# Altium PCB opto.PcbDoc (part 1 of 2)
Units mm, origin at the board's own origin, x right, y up, seen from the top; angles counter-clockwise.
Board outline 200 x 100 mm, 4 copper layers (Top Layer, Internal Plane 1, Internal Plane 2, Bottom Layer); 191 components, 0 nets, 885 pads, 39 vias.
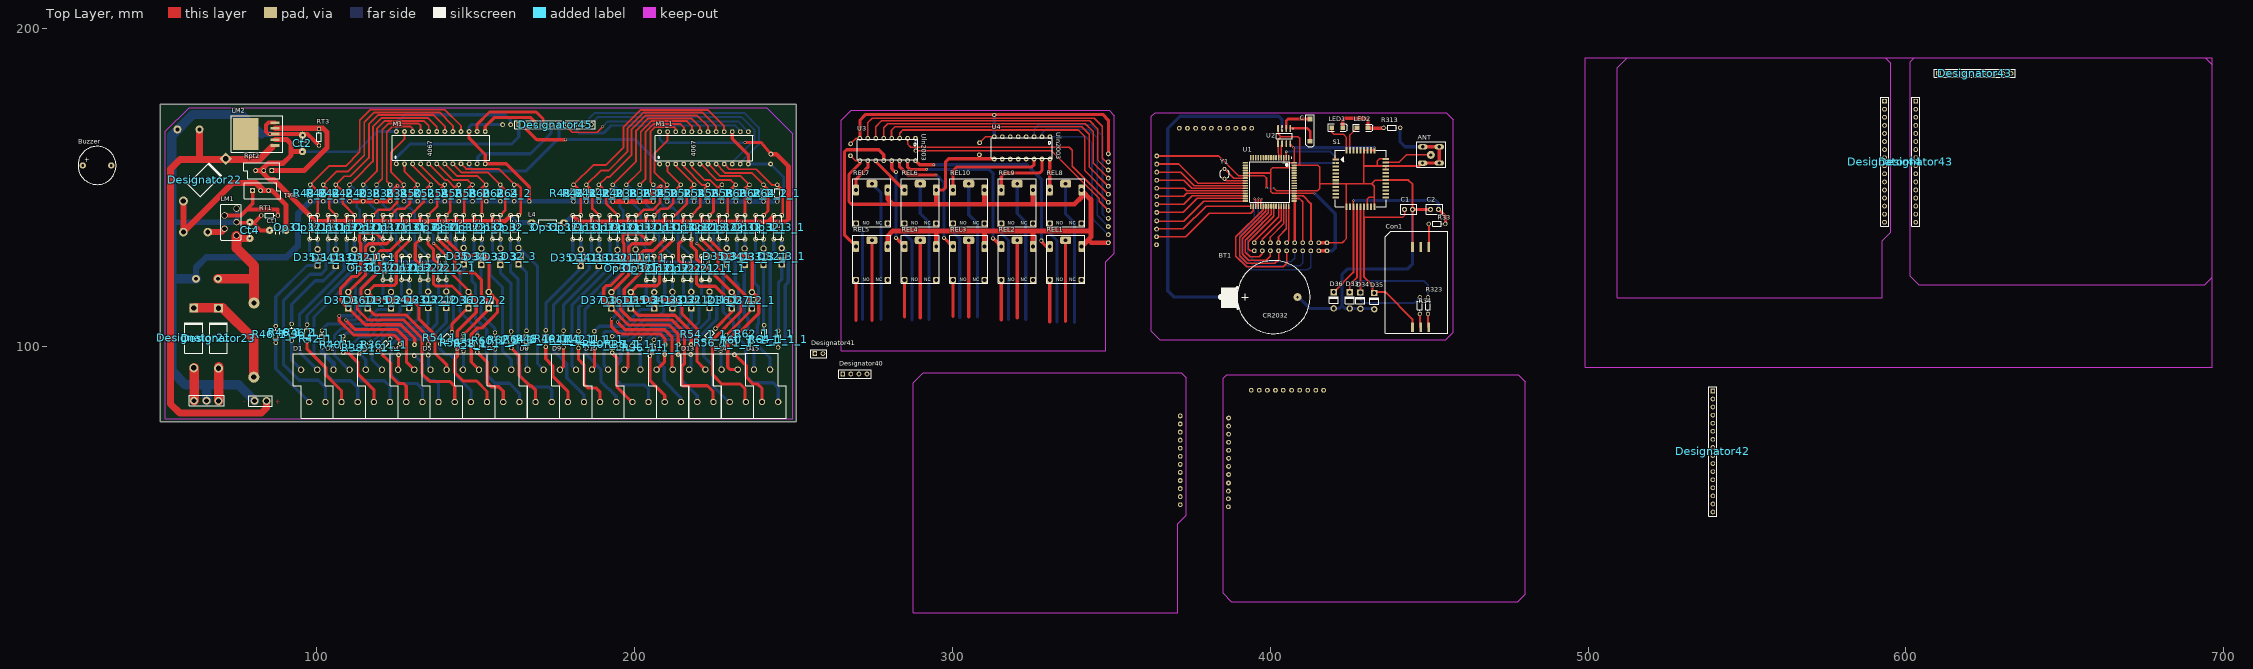
[diagram p0: Top Layer view]
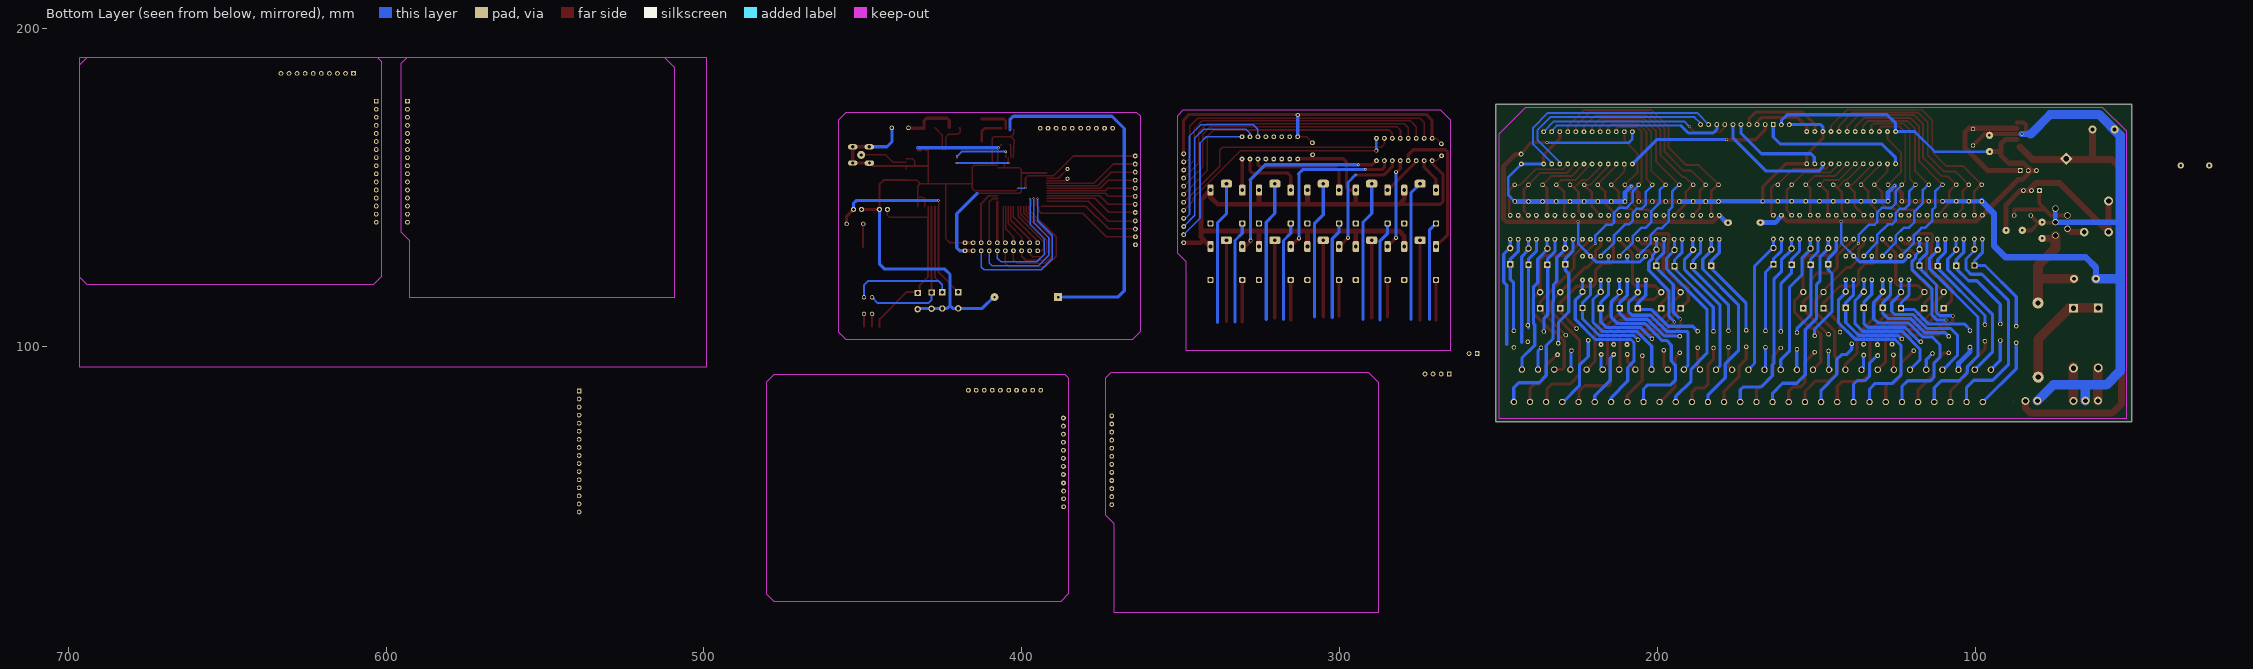
[diagram p1: Bottom Layer view, seen from below]
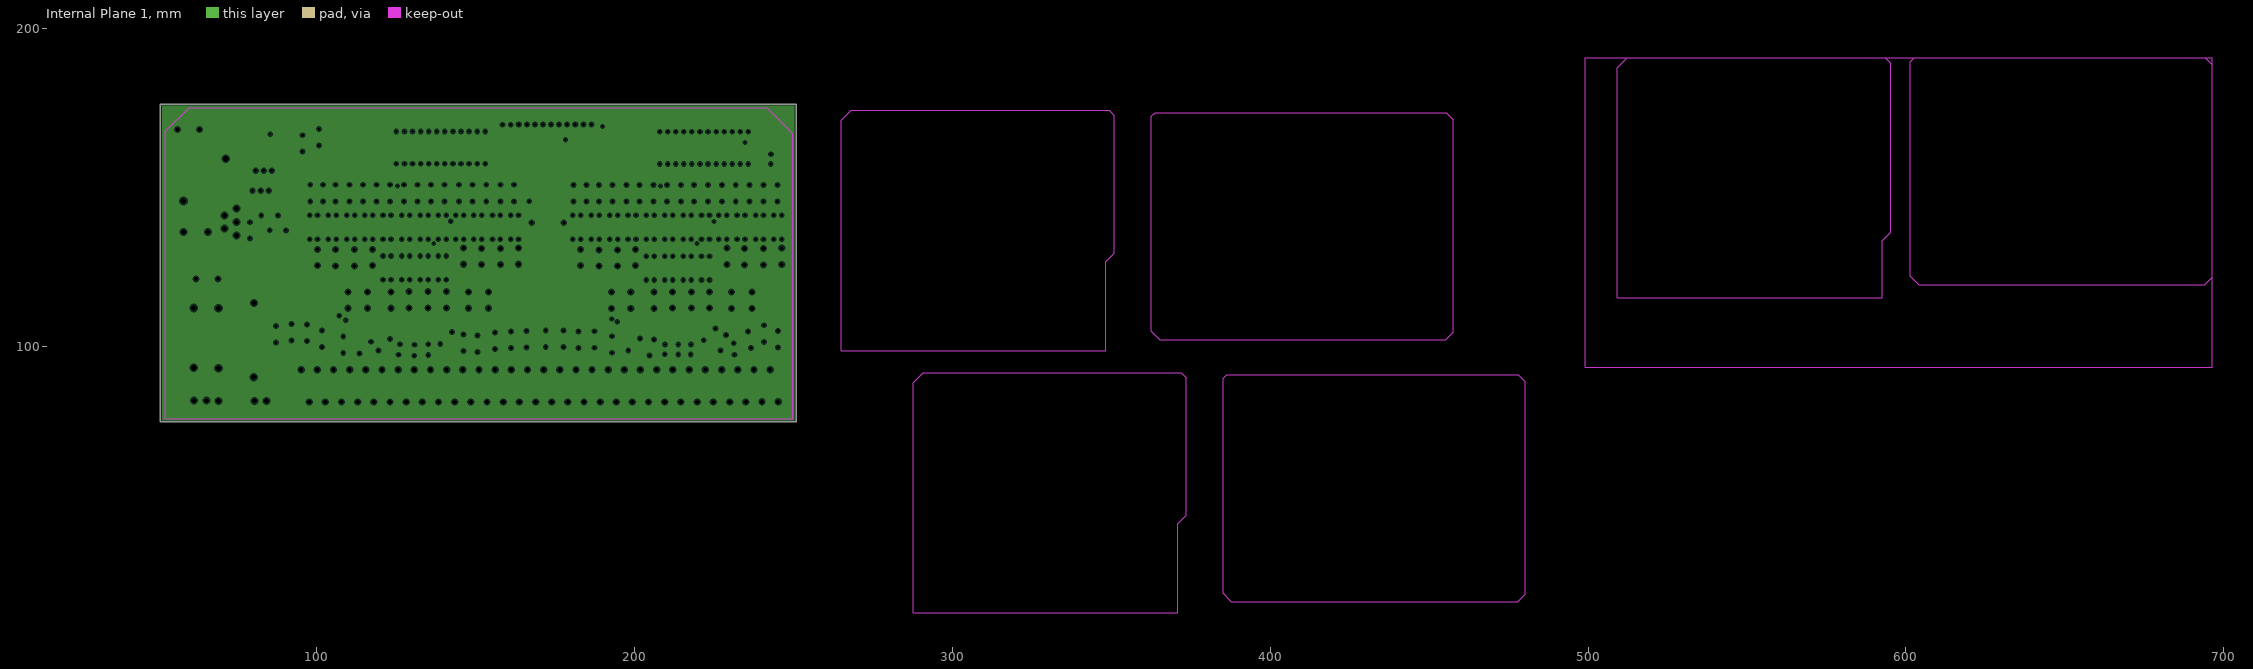
[diagram p2: Internal Plane 1, clearances drawn from the general rule]
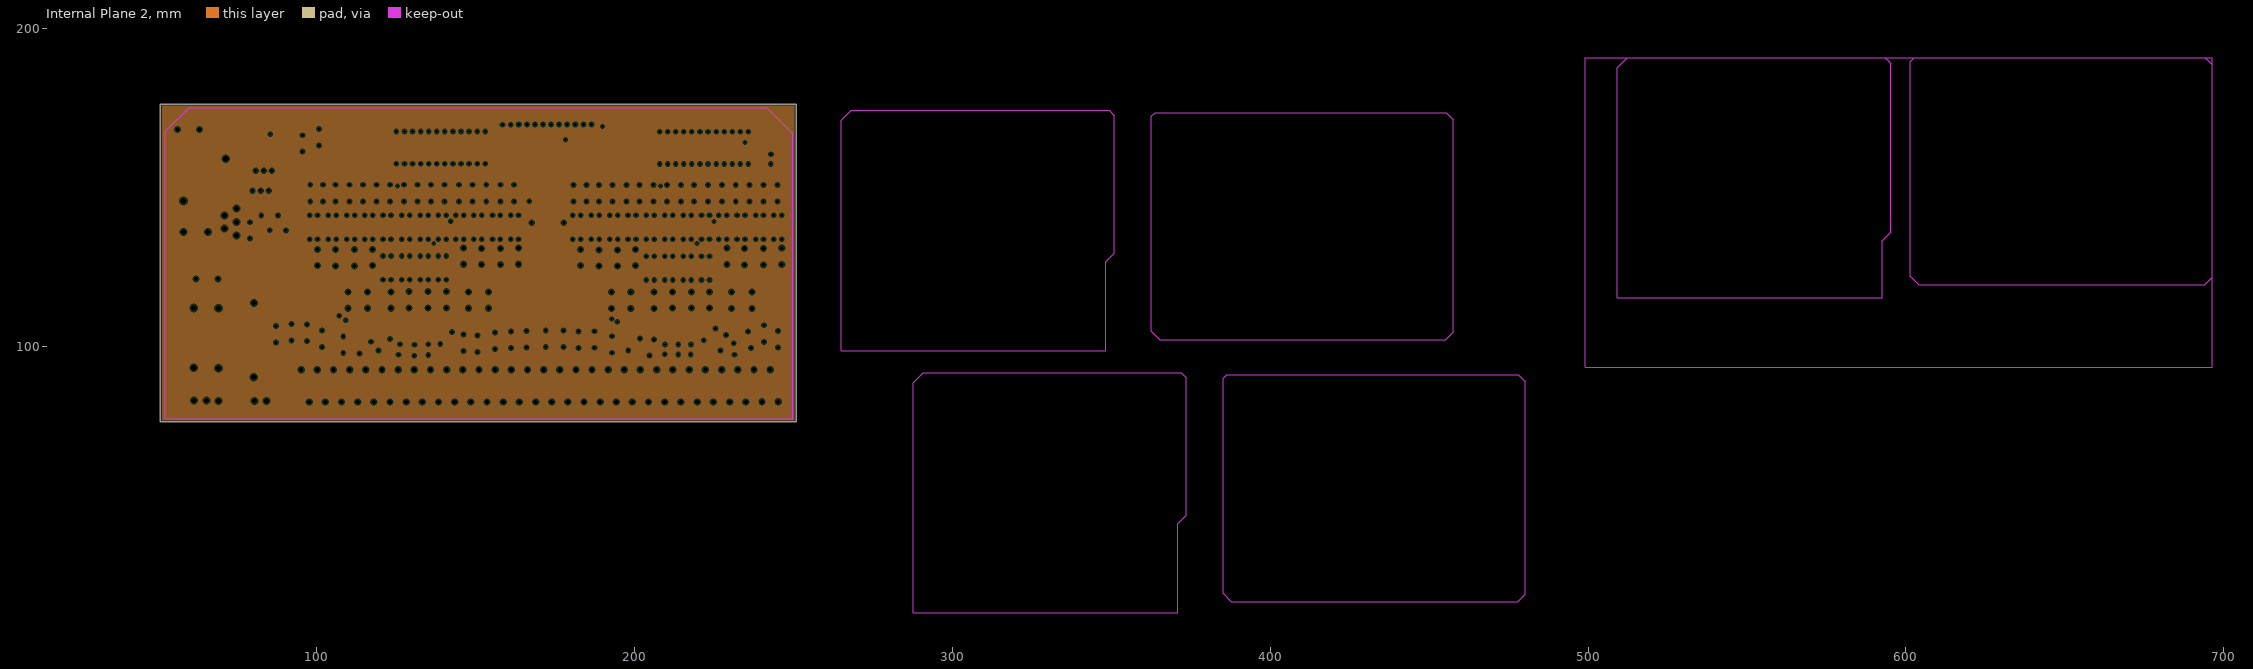
[diagram p3: Internal Plane 2, clearances drawn from the general rule]

## Layer stack, top to bottom
Top Solder: solder mask 0.0102, Solder Resist, Dk 3.5
Top Layer: signal copper 0.0356
Dielectric1: dielectric 0.32, FR-4, Dk 4.8
Internal Plane 1: plane copper 0.0356
Dielectric2: dielectric 0.32, FR-4, Dk 4.8
Internal Plane 2: plane copper 0.0356
Dielectric3: dielectric 0.32, FR-4, Dk 4.8
Bottom Layer: signal copper 0.0356
Bottom Solder: solder mask 0.0102, Solder Resist, Dk 3.5

## Board outline
50.8,76.2 250.8,76.2 250.8,176.2 50.8,176.2

## Design rules (kind name [scope] priority, off if disabled: settings)
Clearance [All] p1: gap=0.2 ignorepadtopadclearanceinfootprint=FALSE except(0: Arc-Hole Track-Hole SMDPad-Hole THPad-Hole Via-Hole Fill-Hole Poly-Hole Region-Hole Text-Hole)
PlaneClearance [All] p1: clearance=0.508
PlaneConnect [All] p1: planeconnectstyle=Relief reliefexpansion=0.508 reliefentries=4 reliefconductorwidth=0.254 reliefairgap=0.254
PolygonConnect [All] p1: connectstyle=Relief reliefconductorwidth=0.254 reliefentries=4 polygonreliefangle="90 Angle" airgapwidth=0.254
RoutingVias [All] p1: holewidth=0.6 width=1 viastyle="Through Hole" minholewidth=0.711 minwidth=1.27 maxholewidth=0.711 maxwidth=1.27
SolderMaskExpansion [All] p1: expansion=0.102
Width [All] p1: maxlimit=0.2 minlimit=0.2 preferedwidth=0.2
28 further rules are at their usual default settings.

## Components (designator, comment, footprint, x,y, rotation, side; value= is the part's Value field where it differs from the comment)
ANT "Antenna" ANT-R-RF 455.199,172.536 r180 top
BT1 "Battery" CR2032 399.544,115.487 r0 top
Buzzer "Buzzer" BUZZER 30.861,156.896 r0 top
C "Crystal" Crystal 412.494,171.512 r270 top
C1 "Cap" CAPR2.54-5.1x3.2 443.515,143.072 r0 top
C2 "Cap" CAPR2.54-5.1x3.2 451.643,143.072 r0 top
Con1 "SIM Socket" "sim card holder" 437.419,134.944 r90 top
Ct1 "22pF" RAD_ADA 90.269,136.449 r180 top
Ct2 "22pF" RAD_ADA 95.476,161.265 r90 top
Ct4 "22pF" RAD_ADA 78.94,133.935 r90 top (schematic designator Ct2)
D1 "Comment" "Conector 4 Pin" 95.061,92.616 r0 top
D2 "Comment" "Conector 4 Pin" 105.236,92.616 r0 top
D3 "Comment" "Conector 4 Pin" 115.411,92.616 r0 top
D4 "Comment" "Conector 4 Pin" 125.586,92.616 r0 top
D5 "Comment" "Conector 4 Pin" 135.761,92.616 r0 top
D6 "Comment" "Conector 4 Pin" 145.936,92.616 r0 top
D7 "Comment" "Conector 4 Pin" 156.111,92.616 r0 top
D8 "Comment" "Conector 4 Pin" 166.286,92.616 r0 top
D9 "Comment" "Conector 4 Pin" 176.461,92.616 r0 top
D10 "Comment" "Conector 4 Pin" 186.586,92.641 r0 top
D11 "Comment" "Conector 4 Pin" 196.736,92.641 r0 top
D12 "Comment" "Conector 4 Pin" 206.911,92.641 r0 top
D13 "Comment" "Conector 4 Pin" 217.161,92.641 r0 top
D14 "Comment" "Conector 4 Pin" 227.361,92.641 r0 top
D15 "Comment" "Conector 4 Pin" 237.538,92.66 r0 top
D32_1_1 "Diode 1N4007 vertical" "D 50mm" 117.497,125.276 r270 top (schematic designator D32)
D32_1_1_1 "Diode 1N4007 vertical" "D 50mm" 200.301,125.225 r270 top (schematic designator D32)
D32_2_1 "Diode 1N4007 vertical" "D 50mm" 140.738,111.964 r270 top (schematic designator D32)
D32_2_1_1 "Diode 1N4007 vertical" "D 50mm" 223.542,111.913 r270 top (schematic designator D32)
D32_3 "Diode 1N4007 vertical" "D 50mm" 163.471,125.68 r270 top (schematic designator D32)
D32_3_1 "Diode 1N4007 vertical" "D 50mm" 246.275,125.629 r270 top (schematic designator D32)
D33 "Diode 1N4007 vertical" "D 50mm" 424.994,117.112 r90 top
D33_1_1 "Diode 1N4007 vertical" "D 50mm" 111.782,125.149 r270 top (schematic designator D32)
D33_1_1_1 "Diode 1N4007 vertical" "D 50mm" 194.586,125.098 r270 top (schematic designator D32)
D33_2_1 "Diode 1N4007 vertical" "D 50mm" 135.023,111.941 r270 top (schematic designator D32)
D33_2_1_1 "Diode 1N4007 vertical" "D 50mm" 217.827,111.89 r270 top (schematic designator D32)
D33_3 "Diode 1N4007 vertical" "D 50mm" 157.756,125.553 r270 top (schematic designator D32)
D33_3_1 "Diode 1N4007 vertical" "D 50mm" 240.56,125.502 r270 top (schematic designator D32)
D34 "Diode 1N4007 vertical" "D 50mm" 428.339,117.037 r90 top
D34_1_1 "Diode 1N4007 vertical" "D 50mm" 105.94,125.172 r270 top (schematic designator D32)
D34_1_1_1 "Diode 1N4007 vertical" "D 50mm" 188.744,125.121 r270 top (schematic designator D32)
D34_2_1 "Diode 1N4007 vertical" "D 50mm" 129.054,111.941 r270 top (schematic designator D32)
D34_2_1_1 "Diode 1N4007 vertical" "D 50mm" 211.858,111.89 r270 top (schematic designator D32)
D34_3 "Diode 1N4007 vertical" "D 50mm" 151.787,125.553 r270 top (schematic designator D32)
D34_3_1 "Diode 1N4007 vertical" "D 50mm" 234.591,125.502 r270 top (schematic designator D32)
D35 "Diode 1N4007 vertical" "D 50mm" 432.719,116.887 r90 top
D35_1_1 "Diode 1N4007 vertical" "D 50mm" 100.225,125.276 r270 top (schematic designator D32)
D35_1_1_1 "Diode 1N4007 vertical" "D 50mm" 183.029,125.225 r270 top (schematic designator D32)
D35_2_1 "Diode 1N4007 vertical" "D 50mm" 123.339,111.837 r270 top (schematic designator D32)
D35_2_1_1 "Diode 1N4007 vertical" "D 50mm" 206.143,111.786 r270 top (schematic designator D32)
D35_3 "Diode 1N4007 vertical" "D 50mm" 146.199,125.68 r270 top (schematic designator D32)
D35_3_1 "Diode 1N4007 vertical" "D 50mm" 229.003,125.629 r270 top (schematic designator D32)
D36 "Diode 1N4007 vertical" "D 50mm" 419.944,117.162 r90 top
D36_1_1 "Diode 1N4007 vertical" "D 50mm" 115.973,111.837 r270 top (schematic designator D32)
D36_1_1_1 "Diode 1N4007 vertical" "D 50mm" 198.777,111.786 r270 top (schematic designator D32)
D36_2 "Diode 1N4007 vertical" "D 50mm" 147.723,111.837 r270 top (schematic designator D32)
D36_2_1 "Diode 1N4007 vertical" "D 50mm" 230.527,111.786 r270 top (schematic designator D32)
D37_1_1 "Diode 1N4007 vertical" "D 50mm" 109.877,111.837 r270 top (schematic designator D32)
D37_1_1_1 "Diode 1N4007 vertical" "D 50mm" 192.681,111.786 r270 top (schematic designator D32)
D37_2 "Diode 1N4007 vertical" "D 50mm" 154.073,111.837 r270 top (schematic designator D32)
D37_2_1 "Diode 1N4007 vertical" "D 50mm" 236.877,111.786 r270 top (schematic designator D32)
Designator21 "Comment" DO-201AD 61.261,102.616 r90 top
Designator22 "Comment" DO-201AD 64.691,152.375 r45 top
Designator23 "Comment" DO-201AD 69.061,102.541 r90 top
Designator40 "Comment" HDR1X4 265.481,91.288 r0 top
Designator41 "Comment" HDR1X2 256.692,97.688 r0 top
Designator42 "Comment" HDR1X16 539.242,85.954 r270 top
Designator43 "Comment" HDR1X16 603.08,177.123 r270 top
Designator43 "Comment" HDR1X10 610.205,185.868 r0 top
Designator44 "Comment" HDR1X16 593.259,177.123 r270 top
Designator45 "Comment" HDR1X10 163.529,169.742 r0 top
L4 "Ferrite-bead" Ferrite-bead 177.736,138.891 r0 top (schematic designator L2)
LED1 "Red" "LED SMD 1206" 421.069,168.787 r0 top
LED2 "Red" "LED SMD 1206" 429.019,168.737 r0 top
LM1 "LM2596T" LM2596T 74.749,143.333 r270 top
LM2 "LM2596T" "LM2596T SMD" 86.84,163.17 r90 top
M1 "Multiplexer_4067" Multiplexer_4067 125.041,157.404 r90 top (schematic designator M2)
M1_1 "Multiplexer_4067" Multiplexer_4067 207.845,157.354 r90 top (schematic designator M2)
Op31_1_1_1_1 "NEC_Opto" NEC_Optocupler 100.225,128.728 r90 top (schematic designator Op31)
Op31_1_1_1_1_1 "NEC_Opto" NEC_Optocupler 183.029,128.677 r90 top (schematic designator Op31)
Op31_1_1_2_1 "NEC_Opto" NEC_Optocupler 123.339,115.901 r90 top (schematic designator Op31)
Op31_1_1_2_1_1 "NEC_Opto" NEC_Optocupler 206.143,115.85 r90 top (schematic designator Op31)
Op31_1_1_3 "NEC_Opto" NEC_Optocupler 123.339,128.728 r90 top (schematic designator Op31)
Op31_1_1_3_1 "NEC_Opto" NEC_Optocupler 206.143,128.677 r90 top (schematic designator Op31)
Op31_1_2 "NEC_Opto" NEC_Optocupler 146.199,128.728 r90 top (schematic designator Op31)
Op31_1_2_1 "NEC_Opto" NEC_Optocupler 229.003,128.677 r90 top (schematic designator Op31)
Op31_2_1_1 "NEC_Opto" NEC_Optocupler 111.909,128.728 r90 top (schematic designator Op31)
Op31_2_1_1_1 "NEC_Opto" NEC_Optocupler 194.713,128.677 r90 top (schematic designator Op31)
Op31_2_2_1 "NEC_Opto" NEC_Optocupler 135.023,115.901 r90 top (schematic designator Op31)
Op31_2_2_1_1 "NEC_Opto" NEC_Optocupler 217.827,115.85 r90 top (schematic designator Op31)
Op31_2_3 "NEC_Opto" NEC_Optocupler 135.023,128.728 r90 top (schematic designator Op31)
Op31_2_3_1 "NEC_Opto" NEC_Optocupler 217.827,128.677 r90 top (schematic designator Op31)
Op31_3 "NEC_Opto" NEC_Optocupler 157.756,128.728 r90 top (schematic designator Op31)
Op31_3_1 "NEC_Opto" NEC_Optocupler 240.56,128.677 r90 top (schematic designator Op31)
Op32_1_1_1_1 "NEC_Opto" NEC_Optocupler 106.067,128.728 r90 top (schematic designator Op31)
Op32_1_1_1_1_1 "NEC_Opto" NEC_Optocupler 188.871,128.677 r90 top (schematic designator Op31)
Op32_1_1_2_1 "NEC_Opto" NEC_Optocupler 129.181,115.901 r90 top (schematic designator Op31)
Op32_1_1_2_1_1 "NEC_Opto" NEC_Optocupler 211.985,115.85 r90 top (schematic designator Op31)
Op32_1_1_3 "NEC_Opto" NEC_Optocupler 129.181,128.728 r90 top (schematic designator Op31)
Op32_1_1_3_1 "NEC_Opto" NEC_Optocupler 211.985,128.677 r90 top (schematic designator Op31)
Op32_1_2 "NEC_Opto" NEC_Optocupler 151.914,128.728 r90 top (schematic designator Op31)
Op32_1_2_1 "NEC_Opto" NEC_Optocupler 234.718,128.677 r90 top (schematic designator Op31)
Op32_2_1_1 "NEC_Opto" NEC_Optocupler 117.624,128.728 r90 top (schematic designator Op31)
Op32_2_1_1_1 "NEC_Opto" NEC_Optocupler 200.428,128.677 r90 top (schematic designator Op31)
Op32_2_2_1 "NEC_Opto" NEC_Optocupler 140.738,115.901 r90 top (schematic designator Op31)
Op32_2_2_1_1 "NEC_Opto" NEC_Optocupler 223.542,115.85 r90 top (schematic designator Op31)
Op32_2_3 "NEC_Opto" NEC_Optocupler 140.738,128.728 r90 top (schematic designator Op31)
Op32_2_3_1 "NEC_Opto" NEC_Optocupler 223.542,128.677 r90 top (schematic designator Op31)
Op32_3 "NEC_Opto" NEC_Optocupler 163.471,128.728 r90 top (schematic designator Op31)
Op32_3_1 "NEC_Opto" NEC_Optocupler 246.275,128.677 r90 top (schematic designator Op31)
R33 "Res3" Res50 453.675,138.5 r0 top
R34 "Res3" Res50 447.071,111.576 r270 top
R34_2 "Resistor vertical" Res50 127.403,149.429 r90 top (schematic designator R34)
R34_2_1 "Resistor vertical" Res50 210.207,149.378 r90 top (schematic designator R34)
R36_1_1 "Resistor vertical" Res50 122.061,101.316 r45 top (schematic designator R36)
R36_1_1_1 "Resistor vertical" Res50 205.711,100.716 r75 top (schematic designator R36)
R36_2 "Resistor vertical" Res50 123.085,149.429 r90 top (schematic designator R36)
R36_2_1 "Resistor vertical" Res50 205.889,149.378 r90 top (schematic designator R36)
R38_1_1 "Resistor vertical" Res50 116.111,100.441 r45 top (schematic designator R38)
R38_1_1_1 "Resistor vertical" Res50 200.686,101.416 r45 top (schematic designator R38)
R38_2 "Resistor vertical" Res50 118.767,149.429 r90 top (schematic designator R38)
R38_2_1 "Resistor vertical" Res50 201.571,149.378 r90 top (schematic designator R38)
R40_1_1 "Resistor vertical" Res50 108.311,101.741 r90 top (schematic designator R40)
R40_1_1_1 "Resistor vertical" Res50 192.936,101.766 r90 top (schematic designator R40)
R40_2 "Resistor vertical" Res50 114.576,149.429 r90 top (schematic designator R40)
R40_2_1 "Resistor vertical" Res50 197.38,149.378 r90 top (schematic designator R40)
R42_1_1 "Resistor vertical" Res50 101.636,103.541 r90 top (schematic designator R42)
R42_1_1_1 "Resistor vertical" Res50 187.311,103.341 r90 top (schematic designator R42)
R42_2 "Resistor vertical" Res50 110.258,149.429 r90 top (schematic designator R42)
R42_2_1 "Resistor vertical" Res50 193.062,149.378 r90 top (schematic designator R42)
R44_1_1_1 "Resistor vertical" Res50 182.336,103.291 r90 top (schematic designator R44)
R44_2 "Resistor vertical" Res50 105.94,149.429 r90 top (schematic designator R44)
R44_2_1 "Resistor vertical" Res50 188.744,149.378 r90 top (schematic designator R44)
R46_1_1 "Resistor vertical" Res50 96.936,105.416 r90 top (schematic designator R46)
R46_1_1_1 "Resistor vertical" Res50 177.636,103.516 r90 top (schematic designator R46)
R46_1_2 "Resistor vertical" Res50 92.086,105.616 r90 top (schematic designator R46)
R46_1_3 "Resistor vertical" Res50 87.086,104.941 r90 top (schematic designator R46)
R46_2 "Resistor vertical" Res50 102.003,149.429 r90 top (schematic designator R46)
R46_2_1 "Resistor vertical" Res50 184.807,149.378 r90 top (schematic designator R46)
R48_1_1_1 "Resistor vertical" Res50 172.036,103.616 r90 top (schematic designator R48)
R48_2 "Resistor vertical" Res50 97.939,149.429 r90 top (schematic designator R48)
R48_2_1 "Resistor vertical" Res50 180.743,149.378 r90 top (schematic designator R48)
R50_2 "Resistor vertical" Res50 131.721,149.429 r90 top (schematic designator R50)
R50_2_1 "Resistor vertical" Res50 214.525,149.378 r90 top (schematic designator R50)
R52_2 "Resistor vertical" Res50 135.912,149.429 r90 top (schematic designator R52)
R52_2_1 "Resistor vertical" Res50 218.716,149.378 r90 top (schematic designator R52)
R54_1_1 "Resistor vertical" Res50 141.536,103.466 r45 top (schematic designator R54)
R54_1_1_1 "Resistor vertical" Res50 224.436,104.591 r45 top (schematic designator R54)
R54_2 "Resistor vertical" Res50 140.23,149.429 r90 top (schematic designator R54)
R54_2_1 "Resistor vertical" Res50 223.034,149.378 r90 top (schematic designator R54)
R56_1_1 "Resistor vertical" Res50 146.136,102.341 r90 top (schematic designator R56)
R56_1_1_1 "Resistor vertical" Res50 228.311,102.216 r70 top (schematic designator R56)
R56_2 "Resistor vertical" Res50 144.675,149.429 r90 top (schematic designator R56)
R56_2_1 "Resistor vertical" Res50 227.479,149.378 r90 top (schematic designator R56)
R58_1_1 "Resistor vertical" Res50 150.511,101.941 r90 top (schematic designator R58)
R58_2 "Resistor vertical" Res50 148.993,149.429 r90 top (schematic designator R58)
R58_2_1 "Resistor vertical" Res50 231.797,149.378 r90 top (schematic designator R58)
R60_1_1 "Resistor vertical" Res50 156.061,102.916 r90 top (schematic designator R60)
R60_1_1_1 "Resistor vertical" Res50 236.361,100.891 r280 top (schematic designator R60)
R60_2 "Resistor vertical" Res50 153.311,149.429 r90 top (schematic designator R60)
R60_2_1 "Resistor vertical" Res50 236.115,149.378 r90 top (schematic designator R60)
R62_1_1 "Resistor vertical" Res50 161.135,103.266 r90 top (schematic designator R62)
R62_1_1_1 "Resistor vertical" Res50 240.736,105.216 r90 top (schematic designator R62)
R62_2 "Resistor vertical" Res50 157.756,149.429 r90 top (schematic designator R62)
R62_2_1 "Resistor vertical" Res50 240.56,149.378 r90 top (schematic designator R62)
R64_1_1 "Resistor vertical" Res50 165.986,103.466 r90 top (schematic designator R64)
R64_1_1_1 "Resistor vertical" Res50 245.132,103.455 r90 top (schematic designator R64)
R64_2 "Resistor vertical" Res50 162.074,149.429 r90 top (schematic designator R64)
R64_2_1 "Resistor vertical" Res50 244.878,149.378 r90 top (schematic designator R64)
R313 "Res3" Res50 439.451,168.726 r0 top
R323 "Res3" Res50 449.611,111.576 r270 top
REL1 "12V SMALL" Relay_5_Small 335.595,127.117 r0 top
REL2 "12V SMALL" Relay_5_Small 320.355,127.117 r0 top
REL3 "12V SMALL" Relay_5_Small 305.115,127.117 r0 top
REL4 "12V SMALL" Relay_5_Small 289.875,127.117 r0 top
REL5 "12V SMALL" Relay_5_Small 274.635,127.117 r0 top
REL6 "12V SMALL" Relay_5_Small 289.875,144.897 r0 top
REL7 "12V SMALL" Relay_5_Small 274.635,144.897 r0 top
REL8 "12V SMALL" Relay_5_Small 335.595,144.897 r0 top
REL9 "12V SMALL" Relay_5_Small 320.355,144.897 r0 top
REL10 "12V SMALL" Relay_5_Small 305.115,144.897 r0 top
Rpt1 "RPot" VR5 82.293,148.972 r0 top
Rpt2 "RPot" VR5 83.284,155.271 r180 top
RT1 "Resistor vertical" Res50 83.919,141.148 r180 top
RT3 "Resistor vertical" Res50 100.683,166.98 r90 top (schematic designator RT2)
S1 "SIM800c" SIM800C 420.655,158.82 r90 top
U1 "ATmega128-16AC" 64A_N 399.827,151.708 r270 top
U2 "DS1307Z" SOIC8N_N 404.369,166.137 r270 top
U3 "Uln2003" PCBComponent_1 269.97,167.517 r270 top
U4 "Uln2003" PCBComponent_1 312.27,168.017 r270 top
Y1 "XTAL" BCY-W2/D3.1 385.603,154.248 r0 top

## Footprints (in the part's own frame and the unit in brackets; to place one, negate y for a bottom-side part, rotate by r counter-clockwise, add the part's x,y. Pads: shape width x height; smd on the part's side, far side on the other; paste and mask are expansions set on the pad)
64A_N [mm] "Thin QFP, 64-Leads, Body 14x14mm, Pitch 0.8mm, IPC Medium Density"
  oval 1.75x0.55 smd: 1(-7.65,6) 2(-7.65,5.2) 3(-7.65,4.4) 4(-7.65,3.6) 5(-7.65,2.8) 6(-7.65,2) 7(-7.65,1.2) 8(-7.65,0.4) 9(-7.65,-0.4) 10(-7.65,-1.2) 11(-7.65,-2) 12(-7.65,-2.8) 13(-7.65,-3.6) 14(-7.65,-4.4) 15(-7.65,-5.2) 16(-7.65,-6) 33(7.65,-6) 34(7.65,-5.2) 35(7.65,-4.4) 36(7.65,-3.6) 37(7.65,-2.8) 38(7.65,-2) 39(7.65,-1.2) 40(7.65,-0.4) 41(7.65,0.4) 42(7.65,1.2) 43(7.65,2) 44(7.65,2.8) 45(7.65,3.6) 46(7.65,4.4) 47(7.65,5.2) 48(7.65,6)
  oval 0.55x1.75 smd: 17(-6,-7.65) 18(-5.2,-7.65) 19(-4.4,-7.65) 20(-3.6,-7.65) 21(-2.8,-7.65) 22(-2,-7.65) 23(-1.2,-7.65) 24(-0.4,-7.65) 25(0.4,-7.65) 26(1.2,-7.65) 27(2,-7.65) 28(2.8,-7.65) 29(3.6,-7.65) 30(4.4,-7.65) 31(5.2,-7.65) 32(6,-7.65) 49(6,7.65) 50(5.2,7.65) 51(4.4,7.65) 52(3.6,7.65) 53(2.8,7.65) 54(2,7.65) 55(1.2,7.65) 56(0.4,7.65) 57(-0.4,7.65) 58(-1.2,7.65) 59(-2,7.65) 60(-2.8,7.65) 61(-3.6,7.65) 62(-4.4,7.65) 63(-5.2,7.65) 64(-6,7.65)
  silkscreen extent -7.77,-6.35 6.35,6.95, body extent -7,-7 7,7, height 1.2
ANT-R-RF [mm] "Antenna; Right; RF;"
  oval 3x1.7 hole 1: 1(2.032,14.859) 1(2.032,9.779) 1(7.239,9.779) 1(7.27,14.89)
  round 2.5 hole 1: 2(4.699,12.319)
  silkscreen extent 0,8.25 9.14,16.26
BCY-W2/D3.1 [mm] "Crystal, Thru-Hole; 2 Leads; Body 3.1 x 8.2 mm (Dia.xH)"
  round 1.3 hole 0.7: 1(0,1.55) 2(0,-1.55)
  silkscreen extent -1.55,-1.19 1.55,1.17
BUZZER [mm] "BUZZER"
  round 2 hole 0.9: 1(-4.5,0) 2(4.45,0)
  silkscreen extent -6,-6 6,6
CAPR2.54-5.1x3.2 [mm] "Capacitor, Ceramic, Thru-Hole, Dipped Radial; Body 5.1 x 3.2 mm (WxT) Pin Spacing 2.54 mm (typ)"
  round 1.65 hole 1: 1(-1.27,0) 2(1.27,0)
  silkscreen extent -2.55,-1.6 2.55,1.6
"Conector 4 Pin" [mm]
  round 2 hole 1.3: 0(0,0) 1(5.08,0) 2(2.54,-10.16) 3(7.62,-10.16)
  silkscreen extent -2.54,-15.24 10.16,5.08
CR2032 [mm] "Battery holder"
  rect 2.5x2.5 hole 0.762: 0(-10.983,0)
  round 2.5 hole 0.762: 1(9.017,0)
  silkscreen extent -15.5,-11.5 13,11.5
Crystal [mm] "6.867"
  rect 1.5x1.5 smd: 0(6.985,0) 1(0,0)
  silkscreen extent -1.27,-1.27 8.76,1.27
"D 50mm" [mm] "50mm Pin Spacing"
  round 2 hole 1.2: 1(-5.23,0)
  rect 2x2 hole 1.2: 2(-0.127,0)
  silkscreen extent -3.68,-1.4 -1.49,1.4
DO-201AD [mm] "Diode, Axial; Body 9.5 x 5.6 mm (LxDia. max), Lead Dia. 1.32 mm (max)"
  round 2.8 hole 1.7: 1(-9.42,0)
  rect 2.8x2.8 hole 1.7: 2(9.42,0)
  silkscreen extent -4.8,-2.8 4.9,2.8
Ferrite-bead [mm]
  oval 2.5x2 hole 1: 1(0,0) 2(-10.16,0.025)
  silkscreen extent -9.45,-1.02 -0.79,0.96
HDR1X2 [mm] "Connector; Header; 2 Position"
  rect 1.5x1.5 hole 0.9: 1(0,0)
  round 1.5 hole 0.9: 2(2.54,0)
  silkscreen extent -1.27,-1.27 3.81,1.27
HDR1X4 [mm] "Connector; Header; 4 Position"
  rect 1.5x1.5 hole 0.9: 1(0,0)
  round 1.5 hole 0.9: 2(2.54,0) 3(5.08,0) 4(7.62,0)
  silkscreen extent -1.27,-1.27 8.89,1.27
HDR1X10 [mm] "Connector; Header; 10 Position"
  rect 1.5x1.5 hole 0.9: 1(0,0)
  round 1.5 hole 0.9: 2(2.54,0) 3(5.08,0) 4(7.62,0) 5(10.16,0) 6(12.7,0) 7(15.24,0) 8(17.78,0) 9(20.32,0) 10(22.86,0)
  silkscreen extent -1.27,-1.27 24.13,1.27
HDR1X16 [mm] "Connector; Header; 16 Position"
  rect 1.5x1.5 hole 0.9: 1(0,0)
  round 1.5 hole 0.9: 2(2.54,0) 3(5.08,0) 4(7.62,0) 5(10.16,0) 6(12.7,0) 7(15.24,0) 8(17.78,0) 9(20.32,0) 10(22.86,0) 11(25.4,0) 12(27.94,0) 13(30.48,0) 14(33.02,0) 15(35.56,0) 16(38.1,0)
  silkscreen extent -1.27,-1.27 39.37,1.27
"LED SMD 1206" [mm]
  rect 1.5x1.5 smd: 1(-1.75,0) 2(1.75,0)
  silkscreen extent -2.9,-1.15 3.2,1.15, body extent -1.65,-0.76 1.65,0.69, height 1.36
LM2596T [mm]
  round 2 hole 1.5: 0(8.5,-0.025) 1(6.35,-3.775) 2(4.275,0) 3(2.15,-3.775) 4(0.025,0)
  silkscreen extent -1.43,-5.05 9.95,1.45
"LM2596T SMD" [mm]
  rect 0.8x2.7 smd: 0(0,0) 1(1.825,0) 2(3.625,0) 3(5.425,0) 4(7.225,0)
  rect 10x8 smd: 5(3.625,9.15)
  silkscreen extent -2.05,-2.42 9.43,13.8
Multiplexer_4067 [mil]
  round 60 hole 30: 0(0,0) 1(-0.98,-100.39) 2(0,-200) 3(0,-300) 4(0,-400) 5(0,-500) 6(0,-600) 7(0,-700) 8(0,-800) 9(0,-900) 10(0,-1000) 11(0,-1100) 14(400,-1100) 15(400,-1000) 16(400,-900) 17(400,-800) 18(400,-700) 19(400,-600) 20(400,-500) 21(400,-400) 22(400,-300) 23(400,-200) 24(400,-100) 25(400,0)
  silkscreen extent 41,-1157 355,51
NEC_Optocupler [mil]
  round 60 hole 30: 0(196.85,98.43) 1(196.85,0) 2(492.13,98.43) 3(492.13,0)
  silkscreen extent 197,0 492,98
PCBComponent_1 [mil]
  round 60 hole 30: 1(82.68,724.41) 2(82.68,625.98) 3(82.68,527.56) 4(82.68,429.13) 5(82.68,330.71) 6(82.68,232.28) 7(82.68,133.86) 8(82.68,35.43) 9(358.27,35.43) 10(358.27,133.86) 11(358.27,232.28) 12(358.27,330.71) 13(358.27,429.13) 14(358.27,527.56) 15(358.27,625.98) 16(358.27,724.41)
  silkscreen extent 96,0 346,755
RAD_ADA [mm]
  round 2.3 hole 0.8: 1(0,0) 2(5.105,-0.026)
  silkscreen extent 0.33,-1.3 4.72,1.24
Relay_5_Small [mm]
  rrect50% 2x3.5 hole 1.2: 1(5,4.25) 2(-5,4.25)
  rrect50% 3.5x2.5 hole 1.2: Com(0,6.25)
  rrect50% 2x2 hole 1.2: NC(5,-6.25) NO(-5,-6.25)
  silkscreen extent -6,-7.25 6,7.75, body extent -6.13,-7.58 6.17,8.12, height 13.71
Res50 [mm] "50mm Pin Spacing"
  round 1.4 hole 0.85: 1(-3.81,0) 2(1.397,0)
  silkscreen extent -2.77,-0.76 0.38,0.76
SIM800C [mil]
  rect 25x80 smd: 0(0,5) 1(-43.18,5) 2(-86.36,5) 3(-129.55,5) 4(-172.73,5) 5(-215.91,5) 6(-259.09,5) 7(-302.27,5) 8(-345.45,5) 9(-388.64,5) 10(-431.82,5) 11(-475,5) 21(-475,-615) 22(-431.36,-615) 23(-387.73,-615) 24(-344.09,-615) 25(-300.45,-615) 26(-256.82,-615) 27(-213.18,-615) 28(-169.55,-615) 29(-125.91,-615) 30(-82.27,-615) 31(-38.64,-615) 32(5,-615)
  rect 80x25 smd: 12(-585,-130) 13(-585,-173.13) 14(-585,-216.25) 15(-585,-259.38) 16(-585,-302.5) 17(-585,-345.63) 18(-585,-388.75) 19(-585,-431.88) 20(-585,-475) 33(115,-475) 34(115,-431.88) 35(115,-388.75) 36(115,-345.63) 37(115,-302.5) 38(115,-259.38) 39(115,-216.25) 40(115,-173.13) 41(115,-130)
  silkscreen extent -590,-620 115,10, body extent -583,-613 110,5, height 88
"sim card holder" [mm]
  rect 3x0.8 smd: 1(-28.959,-12.395) 2(-28.959,-9.855) 3(-28.959,-7.315) 4(-3.708,-12.395) 5(-3.708,-9.855) 6(-3.708,-7.315)
  silkscreen extent -30.84,-18.4 1.2,1.2, body extent -29.64,-17.2 0,0, height 2.6
SOIC8N_N [mm] "SOIC, 8-Leads, Body 4.9x3.9mm, Pitch 1.27mm, IPC Medium Density"
  oval 2.2x0.6 smd: 1(-2.4,1.905) 2(-2.4,0.635) 3(-2.4,-0.635) 4(-2.4,-1.905) 5(2.4,-1.905) 6(2.4,-0.635) 7(2.4,0.635) 8(2.4,1.905)
  silkscreen extent -2.52,-2.5 0.9,2.88, body extent -2,-2.5 2,2.5, height 1.75
VR5 [mm] "Thru-Hole; 3 Leads"
  rect 1.5x1.5 hole 1: 1(-2.54,0)
  round 1.5 hole 1: 2(0,0) 3(2.54,0)
  silkscreen extent -5.08,-2.54 6.35,2.54

## Part data
ANT: "Right RF Antenna"
BT1: library part "Battery holder", "Battery holder CR2032"
C1 C2: "Capacitor"
Con1 S1 U3 U4: library part Component_1
Ct1 Ct2 Ct4: library part "Cap Semi_1", "Capacitor (Semiconductor SIM Model)"
D32_1_1 D32_1_1_1 D32_2_1 D32_2_1_1 D32_3 D32_3_1 D33 D33_1_1 D33_1_1_1 D33_2_1 D33_2_1_1 D33_3 D33_3_1 D34 D34_1_1 D34_1_1_1 D34_2_1 D34_2_1_1 D34_3 D34_3_1 D35 D35_1_1 D35_1_1_1 D35_2_1 D35_2_1_1 D35_3 D35_3_1 D36 D36_1_1 D36_1_1_1 D36_2 D36_2_1 D37_1_1 D37_1_1_1 D37_2 D37_2_1: "1 Amp General Purpose Rectifier"
LED1 LED2: library part LED, "LED"
R33 R34 R313 R323: "Resistor"
R34_2 R34_2_1 R36_1_1 R36_1_1_1 R36_2 R36_2_1 R38_1_1 R38_1_1_1 R38_2 R38_2_1 R40_1_1 R40_1_1_1 R40_2 R40_2_1 R42_1_1 R42_1_1_1 R42_2 R42_2_1 R44_1_1_1 R44_2 R44_2_1 R46_1_1 R46_1_1_1 R46_1_2 R46_1_3 R46_2 R46_2_1 R48_1_1_1 R48_2 R48_2_1 R50_2 R50_2_1 R52_2 R52_2_1 R54_1_1 R54_1_1_1 R54_2 R54_2_1 R56_1_1 R56_1_1_1 R56_2 R56_2_1 R58_1_1 R58_2 R58_2_1 R60_1_1 R60_1_1_1 R60_2 R60_2_1 R62_1_1 R62_1_1_1 R62_2 R62_2_1 R64_1_1 R64_1_1_1 R64_2 R64_2_1 RT1 RT3: "Resistor 0.5"
REL1 REL2 REL3 REL4 REL5 REL6 REL7 REL8 REL9 REL10: library part HJR-78F-12VDC-S-Z
Rpt1 Rpt2: "Potentiometer"
U1: "8-Bit AVR Microcontroller with 128K Bytes of In-System Programmable Flash Memory"
U2: "64 X 8 Serial Real-Time Clock"
Y1: "Crystal Oscillator"

## Free pads (board coordinates)
  round 2.5 hole 1.2: 0(56.131,168.225) 0(68.92,121.221) 1(61.986,121.221) 1(63.065,168.225)
  round 1.524 hole 0.762: 0(242.77,157.354) 0(349.05,160.537) 0(364.269,159.877) 0(371.394,168.622) 0(371.656,78.089) 0(384.094,168.622) 0(386.875,77.428) 0(394,86.173) 0(406.7,86.173) 1(349.05,157.997) 1(364.269,157.337) 1(371.656,75.549) 1(373.934,168.622) 1(386.634,168.622) 1(386.875,74.888) 1(396.54,86.173) 1(409.24,86.173) 2(242.886,160.466) 2(349.05,155.457) 2(364.269,154.797) 2(371.656,73.009) 2(376.474,168.622) 2(386.875,72.348) 2(389.174,168.622) 2(399.08,86.173) 2(411.78,86.173) 3(349.05,152.917) 3(364.269,152.257) 3(371.656,70.469) 3(379.014,168.622) 3(386.875,69.808) 3(391.714,168.622) 3(401.62,86.173) 3(414.32,86.173) 4(349.05,150.377) 4(364.269,149.717) 4(371.656,67.929) 4(381.454,168.622) 4(386.875,67.268) 4(394.154,168.622) 4(404.06,86.173) 4(416.76,86.173) 5(349.05,147.837) 5(364.269,147.177) 5(371.656,65.389) 5(386.875,64.728) 6(231.186,100.966) 6(349.05,145.297) 6(364.269,144.637) 6(371.656,62.849) 6(386.875,62.188) 7(231.411,97.366) 7(349.05,142.757) 7(364.269,142.097) 7(371.656,60.309) 7(386.875,59.648) 8(209.536,100.566) 8(349.05,140.217) 8(364.219,136.887) 8(364.244,139.437) 8(371.656,57.769) 8(386.825,54.438) 8(386.85,56.988) 9(213.761,100.566) 9(349.05,137.677) 9(371.656,55.229) 10(217.736,100.566) 10(349.05,135.137) 10(364.194,134.477) 10(371.656,52.689) 10(386.8,52.028) 11(217.686,97.416) 11(267.945,163.692) 11(349.05,132.597) 11(364.194,131.937) 11(371.656,50.149) 11(386.8,49.488) 11(394.964,132.577) 12(213.711,97.416) 12(267.907,159.93) 12(394.964,130.037) 13(209.461,97.441) 13(308.52,164.017) 13(397.504,130.037) 14(126.161,100.641) 14(308.47,160.242) 14(397.504,132.577) 15(125.711,97.291) 15(400.044,132.577) 16(130.661,97.066) 16(400.044,130.037) 17(130.736,100.516) 17(402.584,130.037) 18(135.111,100.591) 18(402.584,132.577) 19(135.086,97.241) 19(405.124,132.577) 20(405.124,130.037) 21(407.664,130.037) 22(407.664,132.577) 23(410.204,132.577) 24(410.204,130.037) 25(412.744,130.037) 26(412.744,132.577) 27(415.284,130.037) 28(415.284,132.577) 29(417.824,132.577) 30(417.824,130.037) 31(160.975,169.742) 32(158.435,169.742)
  round 3.5 hole 1.6: 2(80.159,90.272) 2(80.236,113.591)
  round 2.7 hole 1.5: 3(58.011,135.916) 3(65.707,135.916)
  round 2.5 hole 1.5: 3(61.369,82.88) 5(65.306,82.88) 5(69.076,82.808) 5(80.423,82.844) 5(84.193,82.772)

## Via types
v1: diameter 0.6, hole 0.4, Top Layer to Bottom Layer, 10 vias
v2: diameter 1.27, hole 0.711, Top Layer to Bottom Layer, 8 vias
v3: diameter 0.8, hole 0.5, Top Layer to Bottom Layer, 6 vias
v4: diameter 1, hole 0.7, Top Layer to Bottom Layer, 5 vias
v5: diameter 0.7, hole 0.4, Top Layer to Bottom Layer, 4 vias
v6: diameter 0.9, hole 0.6, Top Layer to Bottom Layer, 3 vias
v7: diameter 0.5, hole 0.4, Top Layer to Bottom Layer, 1 vias
v8: diameter 1, hole 0.6, Top Layer to Bottom Layer, 1 vias
v9: diameter 1, hole 0.65, Top Layer to Bottom Layer, 1 vias

## Nets (pads, with @x,y where several pads share a name; then routed paths per layer and width w, separated by ;. In a path a pad name is that pad's centre, name@x,y a point inside that pad or via, vN(x,y) a via of type N, cw(c..) or ccw(c..) an arc to the next point about the centre after c; other vN are vias at no path point)
pads on no net: ANT.1 ANT.2 BT1.0 BT1.1 Buzzer.1 Buzzer.2 C1.1 C1.2 C2.1 C2.2 C.0 C.1 Con1.1 Con1.2 Con1.3 Con1.4 Con1.5 Con1.6 Ct1.1 Ct1.2 Ct2.1 Ct2.2 Ct4.1 Ct4.2 D1.0 D1.1 D1.2 D1.3 D2.0 D2.1 D2.2 D2.3 D3.0 D3.1 D3.2 D3.3 D4.0 D4.1 D4.2 D4.3 D5.0 D5.1 D5.2 D5.3 D6.0 D6.1 D6.2 D6.3 D7.0 D7.1 D7.2 D7.3 D8.0 D8.1 D8.2 D8.3 D9.0 D9.1 D9.2 D9.3 D10.0 D10.1 D10.2 D10.3 D11.0 D11.1 D11.2 D11.3 D12.0 D12.1 D12.2 D12.3 D13.0 D13.1 D13.2 D13.3 D14.0 D14.1 D14.2 D14.3 D15.0 D15.1 D15.2 D15.3 D32_1_1.1 D32_1_1.2 D32_1_1_1.1 D32_1_1_1.2 D32_2_1.1 D32_2_1.2 D32_2_1_1.1 D32_2_1_1.2 D32_3.1 D32_3.2 D32_3_1.1 D32_3_1.2 D33.1 D33.2 D33_1_1.1 D33_1_1.2 D33_1_1_1.1 D33_1_1_1.2 D33_2_1.1 D33_2_1.2 D33_2_1_1.1 D33_2_1_1.2 D33_3.1 D33_3.2 D33_3_1.1 D33_3_1.2 D34.1 D34.2 D34_1_1.1 D34_1_1.2 D34_1_1_1.1 D34_1_1_1.2 D34_2_1.1 D34_2_1.2 D34_2_1_1.1 D34_2_1_1.2 D34_3.1 D34_3.2 D34_3_1.1 D34_3_1.2 D35.1 D35.2 D35_1_1.1 D35_1_1.2 D35_1_1_1.1 D35_1_1_1.2 D35_2_1.1 D35_2_1.2 D35_2_1_1.1 D35_2_1_1.2 D35_3.1 D35_3.2 D35_3_1.1 D35_3_1.2 D36.1 D36.2 D36_1_1.1 D36_1_1.2 D36_1_1_1.1 D36_1_1_1.2 D36_2.1 D36_2.2 D36_2_1.1 D36_2_1.2 D37_1_1.1 D37_1_1.2 D37_1_1_1.1 D37_1_1_1.2 D37_2.1 D37_2.2 D37_2_1.1 D37_2_1.2 Designator21.1 Designator21.2 Designator22.1 Designator22.2 Designator23.1 Designator23.2 Designator40.1 Designator40.2 Designator40.3 Designator40.4 Designator41.1 Designator41.2 Designator42.1 Designator42.2 Designator42.3 Designator42.4 Designator42.5 Designator42.6 Designator42.7 Designator42.8 Designator42.9 Designator42.10 Designator42.11 Designator42.12 Designator42.13 Designator42.14 Designator42.15 Designator42.16 Designator43.1 Designator43.2 Designator43.3 Designator43.4 Designator43.5 Designator43.6 Designator43.7 Designator43.8 Designator43.9 Designator43.10 Designator43.11 Designator43.12 Designator43.13 Designator43.14 Designator43.15 Designator43.16 Designator44.1 Designator44.2 Designator44.3 Designator44.4 Designator44.5 Designator44.6 Designator44.7 Designator44.8 Designator44.9 Designator44.10 Designator44.11 Designator44.12 Designator44.13 Designator44.14 Designator44.15 Designator44.16 Designator45.1 Designator45.2 Designator45.3 Designator45.4 Designator45.5 Designator45.6 Designator45.7 Designator45.8 Designator45.9 Designator45.10 L4.1 L4.2 LED1.1 LED1.2 LED2.1 LED2.2 LM1.0 LM1.1 LM1.2 LM1.3 LM1.4 LM2.0 LM2.1 LM2.2 LM2.3 LM2.4 LM2.5 M1.0 M1.1 M1.2 M1.3 M1.4 M1.5 M1.6 M1.7 M1.8 M1.9 M1.10 M1.11 M1.14 M1.15 M1.16 M1.17 M1.18 M1.19 M1.20 M1.21 M1.22 M1.23 M1.24 M1.25 M1_1.0 M1_1.1 M1_1.2 M1_1.3 M1_1.4 M1_1.5 M1_1.6 M1_1.7 M1_1.8 M1_1.9 M1_1.10 M1_1.11 M1_1.14 M1_1.15 M1_1.16 M1_1.17 M1_1.18 M1_1.19 M1_1.20 M1_1.21 M1_1.22 M1_1.23 M1_1.24 M1_1.25 Op31_1_1_1_1.0 Op31_1_1_1_1.1 Op31_1_1_1_1.2 Op31_1_1_1_1.3 Op31_1_1_1_1_1.0 Op31_1_1_1_1_1.1 Op31_1_1_1_1_1.2 Op31_1_1_1_1_1.3 Op31_1_1_2_1.0 Op31_1_1_2_1.1 Op31_1_1_2_1.2 Op31_1_1_2_1.3 Op31_1_1_2_1_1.0 Op31_1_1_2_1_1.1 Op31_1_1_2_1_1.2 Op31_1_1_2_1_1.3 Op31_1_1_3.0 Op31_1_1_3.1 Op31_1_1_3.2 Op31_1_1_3.3 Op31_1_1_3_1.0 Op31_1_1_3_1.1 Op31_1_1_3_1.2 Op31_1_1_3_1.3 Op31_1_2.0 Op31_1_2.1 Op31_1_2.2 Op31_1_2.3 Op31_1_2_1.0 Op31_1_2_1.1 Op31_1_2_1.2 Op31_1_2_1.3 Op31_2_1_1.0 Op31_2_1_1.1 Op31_2_1_1.2 Op31_2_1_1.3 Op31_2_1_1_1.0 Op31_2_1_1_1.1 Op31_2_1_1_1.2 Op31_2_1_1_1.3 Op31_2_2_1.0 Op31_2_2_1.1 Op31_2_2_1.2 Op31_2_2_1.3 Op31_2_2_1_1.0 Op31_2_2_1_1.1 Op31_2_2_1_1.2 Op31_2_2_1_1.3 Op31_2_3.0 Op31_2_3.1 Op31_2_3.2 Op31_2_3.3 Op31_2_3_1.0 Op31_2_3_1.1 Op31_2_3_1.2 Op31_2_3_1.3 Op31_3.0 Op31_3.1 Op31_3.2 Op31_3.3 Op31_3_1.0 Op31_3_1.1 Op31_3_1.2 Op31_3_1.3 Op32_1_1_1_1.0 Op32_1_1_1_1.1 Op32_1_1_1_1.2 Op32_1_1_1_1.3 Op32_1_1_1_1_1.0 Op32_1_1_1_1_1.1 Op32_1_1_1_1_1.2 Op32_1_1_1_1_1.3 Op32_1_1_2_1.0 Op32_1_1_2_1.1 Op32_1_1_2_1.2 Op32_1_1_2_1.3 Op32_1_1_2_1_1.0 Op32_1_1_2_1_1.1 Op32_1_1_2_1_1.2 Op32_1_1_2_1_1.3 Op32_1_1_3.0 Op32_1_1_3.1 Op32_1_1_3.2 Op32_1_1_3.3 Op32_1_1_3_1.0 Op32_1_1_3_1.1 Op32_1_1_3_1.2 Op32_1_1_3_1.3 Op32_1_2.0 Op32_1_2.1 Op32_1_2.2 Op32_1_2.3 Op32_1_2_1.0 Op32_1_2_1.1 Op32_1_2_1.2 Op32_1_2_1.3 Op32_2_1_1.0 Op32_2_1_1.1 Op32_2_1_1.2 Op32_2_1_1.3 Op32_2_1_1_1.0 Op32_2_1_1_1.1 Op32_2_1_1_1.2 Op32_2_1_1_1.3 Op32_2_2_1.0 Op32_2_2_1.1 Op32_2_2_1.2 Op32_2_2_1.3 Op32_2_2_1_1.0 Op32_2_2_1_1.1 Op32_2_2_1_1.2 Op32_2_2_1_1.3 Op32_2_3.0 Op32_2_3.1 Op32_2_3.2 Op32_2_3.3 Op32_2_3_1.0 Op32_2_3_1.1 Op32_2_3_1.2 Op32_2_3_1.3 Op32_3.0 Op32_3.1 Op32_3.2 Op32_3.3 Op32_3_1.0 Op32_3_1.1 Op32_3_1.2 Op32_3_1.3 R33.1 R33.2 R34.1 R34.2 R34_2.1 R34_2.2 R34_2_1.1 R34_2_1.2 R36_1_1.1 R36_1_1.2 R36_1_1_1.1 R36_1_1_1.2 R36_2.1 R36_2.2 R36_2_1.1 R36_2_1.2 R38_1_1.1 R38_1_1.2 R38_1_1_1.1 R38_1_1_1.2 R38_2.1 R38_2.2 R38_2_1.1 R38_2_1.2 R40_1_1.1 R40_1_1.2 R40_1_1_1.1 R40_1_1_1.2 R40_2.1 R40_2.2 R40_2_1.1 R40_2_1.2 R42_1_1.1 R42_1_1.2 R42_1_1_1.1 R42_1_1_1.2 R42_2.1 R42_2.2 R42_2_1.1 R42_2_1.2 R44_1_1_1.1 R44_1_1_1.2 R44_2.1 R44_2.2 R44_2_1.1 R44_2_1.2 R46_1_1.1 R46_1_1.2 R46_1_1_1.1 R46_1_1_1.2 R46_1_2.1 R46_1_2.2 R46_1_3.1 R46_1_3.2 R46_2.1 R46_2.2 R46_2_1.1 R46_2_1.2 R48_1_1_1.1 R48_1_1_1.2 R48_2.1 R48_2.2 R48_2_1.1 R48_2_1.2 R50_2.1 R50_2.2 R50_2_1.1 R50_2_1.2 R52_2.1 R52_2.2 R52_2_1.1 R52_2_1.2 R54_1_1.1 R54_1_1.2 R54_1_1_1.1 R54_1_1_1.2 R54_2.1 R54_2.2 R54_2_1.1 R54_2_1.2 R56_1_1.1 R56_1_1.2 R56_1_1_1.1 R56_1_1_1.2 R56_2.1 R56_2.2 R56_2_1.1 R56_2_1.2 R58_1_1.1 R58_1_1.2 R58_2.1 R58_2.2 R58_2_1.1 R58_2_1.2 R60_1_1.1 R60_1_1.2 R60_1_1_1.1 R60_1_1_1.2 R60_2.1 R60_2.2 R60_2_1.1 R60_2_1.2 R62_1_1.1 R62_1_1.2 R62_1_1_1.1 R62_1_1_1.2 R62_2.1 R62_2.2 R62_2_1.1 R62_2_1.2 R64_1_1.1 R64_1_1.2 R64_1_1_1.1 R64_1_1_1.2 R64_2.1 R64_2.2 R64_2_1.1 R64_2_1.2 R313.1 R313.2 R323.1 R323.2 REL1.1 REL1.2 REL1.Com REL1.NC REL1.NO REL2.1 REL2.2 REL2.Com REL2.NC REL2.NO REL3.1 REL3.2 REL3.Com REL3.NC REL3.NO REL4.1 REL4.2 REL4.Com REL4.NC REL4.NO REL5.1 REL5.2 REL5.Com REL5.NC REL5.NO REL6.1 REL6.2 REL6.Com REL6.NC REL6.NO REL7.1 REL7.2 REL7.Com REL7.NC REL7.NO REL8.1 REL8.2 REL8.Com REL8.NC REL8.NO REL9.1 REL9.2 REL9.Com REL9.NC REL9.NO REL10.1 REL10.2 REL10.Com REL10.NC REL10.NO Rpt1.1 Rpt1.2 Rpt1.3 Rpt2.1 Rpt2.2 Rpt2.3 RT1.1 RT1.2 RT3.1 RT3.2 S1.0 S1.1 S1.2 S1.3 S1.4 S1.5 S1.6 S1.7 S1.8 S1.9 S1.10 S1.11 S1.12 S1.13 S1.14 S1.15 S1.16 S1.17 S1.18 S1.19 S1.20 S1.21 S1.22 S1.23 S1.24 S1.25 S1.26 S1.27 S1.28 S1.29 S1.30 S1.31 S1.32 S1.33 S1.34 S1.35 S1.36 S1.37 S1.38 S1.39 S1.40 S1.41 U1.1 U1.2 U1.3 U1.4 U1.5 U1.6 U1.7 U1.8 U1.9 U1.10 U1.11 U1.12 U1.13 U1.14 U1.15 U1.16 U1.17 U1.18 U1.19 U1.20 U1.21 U1.22 U1.23 U1.24 U1.25 U1.26 U1.27 U1.28 U1.29 U1.30 U1.31 U1.32 U1.33 U1.34 U1.35 U1.36 U1.37 U1.38 U1.39 U1.40 U1.41 U1.42 U1.43 U1.44 U1.45 U1.46 U1.47 U1.48 U1.49 U1.50 U1.51 U1.52 U1.53 U1.54 U1.55 U1.56 U1.57 U1.58 U1.59 U1.60 U1.61 U1.62 U1.63 U1.64 U2.1 U2.2 U2.3 U2.4 U2.5 U2.6 U2.7 U2.8 U3.1 U3.2 U3.3 U3.4 U3.5 U3.6 U3.7 U3.8 U3.9 U3.10 U3.11 U3.12 U3.13 U3.14 U3.15 U3.16 U4.1 U4.2 U4.3 U4.4 U4.5 U4.6 U4.7 U4.8 U4.9 U4.10 U4.11 U4.12 U4.13 U4.14 U4.15 U4.16 Y1.1 Y1.2